# EAGLE board OPA1612 Breakout v3 (EAGLE 9.7.0)
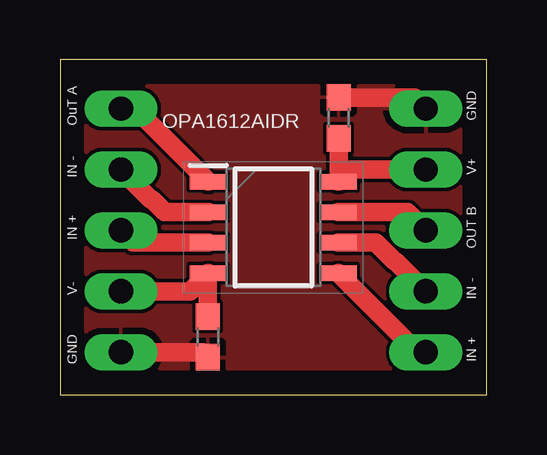
[diagram p0: board, top side]
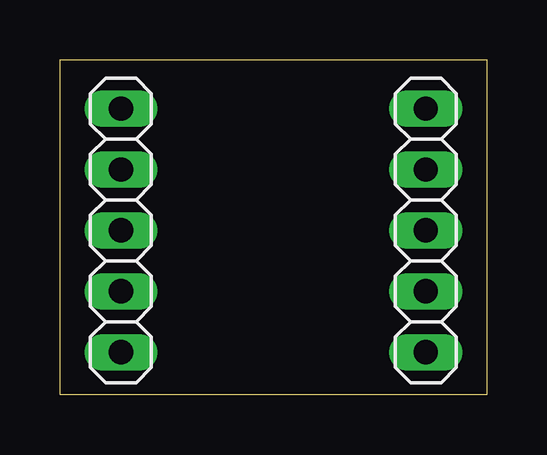
[diagram p1: board, bottom side, seen from below]

Size 17.78 x 13.97 mm. Coordinates in mm from the lower left corner, seen from the top.
Outline: 0,0 17.78,0 17.78,13.97 0,13.97 0,0
Copper layers (1*16): Top / Bottom
Stack-up Default Layer Stack: Top SilkScreen Epoxy Ink / Top SolderMask SR:Green 0.0254mm Dk 4.3 / Top Surface Finish Lead-Free 0.02mm / Top CuFoil:007 0.035mm / Dielectric-1 User Defined 1.5mm / Bottom CuFoil:007 0.035mm / Bottom Surface Finish Lead-Free 0.02mm / Bottom SolderMask SR:Green 0.0254mm Dk 4.3 / Bottom SilkScreen Epoxy Ink
Design rules: minimum copper width 6mil, minimum drill size 0.35mm, copper clearance wire_polygon to wire_polygon 6mil, copper clearance wire_polygon to pad_smd 6mil, copper clearance wire_polygon to via 6mil, copper clearance pad_smd to pad_smd 6mil, copper clearance pad_smd to via 6mil, copper clearance via to via 6mil, copper clearance smd to pad (same net) 6mil, copper clearance smd to via (same net) 6mil, copper clearance smd to smd (same net) 6mil, restrict clearance 0mil, dimension clearance 40mil, via restrict clearance 0mil, drill distance 6mil, keepout clearance 0mil

## Footprints (pad centres in the part's own frame; a part is rotated, then mirrored left to right if it is on the bottom)
0603 = smd 1.1 x 1: 1 -0.85,0; 2 0.85,0
SOIC127P600X175-8N = smd 1.528 x 0.65: 1 -2.711,1.905; 2 -2.711,0.635; 3 -2.711,-0.635; 4 -2.711,-1.905; 5 2.711,-1.905; 6 2.711,-0.635; 7 2.711,0.635; 8 2.711,1.905
1X05 = drill 1.016 long: 1 -5.08,0; 2 -2.54,0; 3 0,0; 4 2.54,0; 5 5.08,0

## Placement (x,y rotation side)
C1  0.1uF  [0603]  11.61,11.55 270 top
C2  0.1uF  [0603]  6.16,2.42 270 top
IC1  OPA1612AIDR  [SOIC127P600X175-8N]  8.89,6.99 0 top
JP1  PINHD-1X5  [1X05]  2.54,6.86 90 bottom
JP2  PINHD-1X5  [1X05]  15.24,6.86 270 bottom

## Library data of the parts
C1 C2 = SparkFun-Capacitors; PROD_ID: CAP-08390
IC1 = OPA1612AIDR; DESCRIPTION: SoundPlus Audio Operational Amplifier with 1.1nV/Hz Noise, Low THD and Precision; HEIGHT: 1.75mm; MANUFACTURER_NAME: Texas Instruments; MANUFACTURER_PART_NUMBER: OPA1612AIDR; MOUSER_PART_NUMBER: 595-OPA1612AIDR; MOUSER_PRICE-STOCK: https://www.mouser.co.uk/ProductDetail/Texas-Instruments/OPA1612AIDR?qs=6805eV47HhYG%252BLJtIoYNNw%3D%3D
JP1 JP2 = Connector; CATEGORY: Headers; DESCRIPTION: Header-Straight-5 Position; PACKAGE_TYPE: THT; PITCH: 0.100" (2.54mm); SUBCATEGORY: Headers-Male Pins; TYPE: Board to Board or Cable-Unshrouded-Through Hole-Straight

## Nets
GND: C1.1 C2.2 JP1.1 JP2.1
N$1: C2.1 IC1.4 JP1.2
N$2: C1.2 IC1.8 JP2.2
N$3: IC1.3 JP1.3
N$4: IC1.2 JP1.4
N$5: IC1.1 JP1.5
N$6: IC1.5 JP2.5
N$7: IC1.6 JP2.4
N$8: IC1.7 JP2.3

## Tracks (layer width: path | path; a pad name or v marks a point on that pad's centre or on a via)
GND
  Top 0.762: C1.1 14.77,12.4 JP2.1 | JP1.1 5.95,1.78 C2.2
  pour Top: -1.27,15.24 19.05,15.24 19.05,-1.27 -1.27,-1.27
N$1
  Top 0.762: C2.1 6.16,5.06 IC1.4 5.42,4.32 JP1.2
N$2
  Top 0.762: C1.2 IC1.8 12.11,9.4 JP2.2
N$3
  Top 0.762: IC1.3 3.05,6.35 JP1.3
N$4
  Top 0.762: IC1.2 4.37,7.62 3.84,8.15 3.79,8.15 JP1.4
N$5
  Top 0.762: JP1.5 3.13,11.94 IC1.1
N$6
  Top 0.762: IC1.5 14.9,1.78 JP2.5
N$7
  Top 0.762: JP2.4 13.99,5.56 13.94,5.56 13.15,6.35 IC1.6
N$8
  Top 0.762: IC1.7 14.48,7.62 JP2.3

## Text on the board
SilkscreenTop: OuT A | GND | OPA1612AIDR | IN - | V+ | IN + | OUT B | V- | IN - | GND | IN +